# Altium PCB PCB2.PcbDoc
Units mil, origin at the board's own origin, x right, y up, seen from the top; angles counter-clockwise.
Board outline 2040 x 2400 mil, 4 copper layers (Top Layer, GND, POW, Bottom Layer), stack 23.756 mil thick; 58 components, 32 nets, 168 pads, 273 vias.
Unrouted connection lines stored in the file: 72.
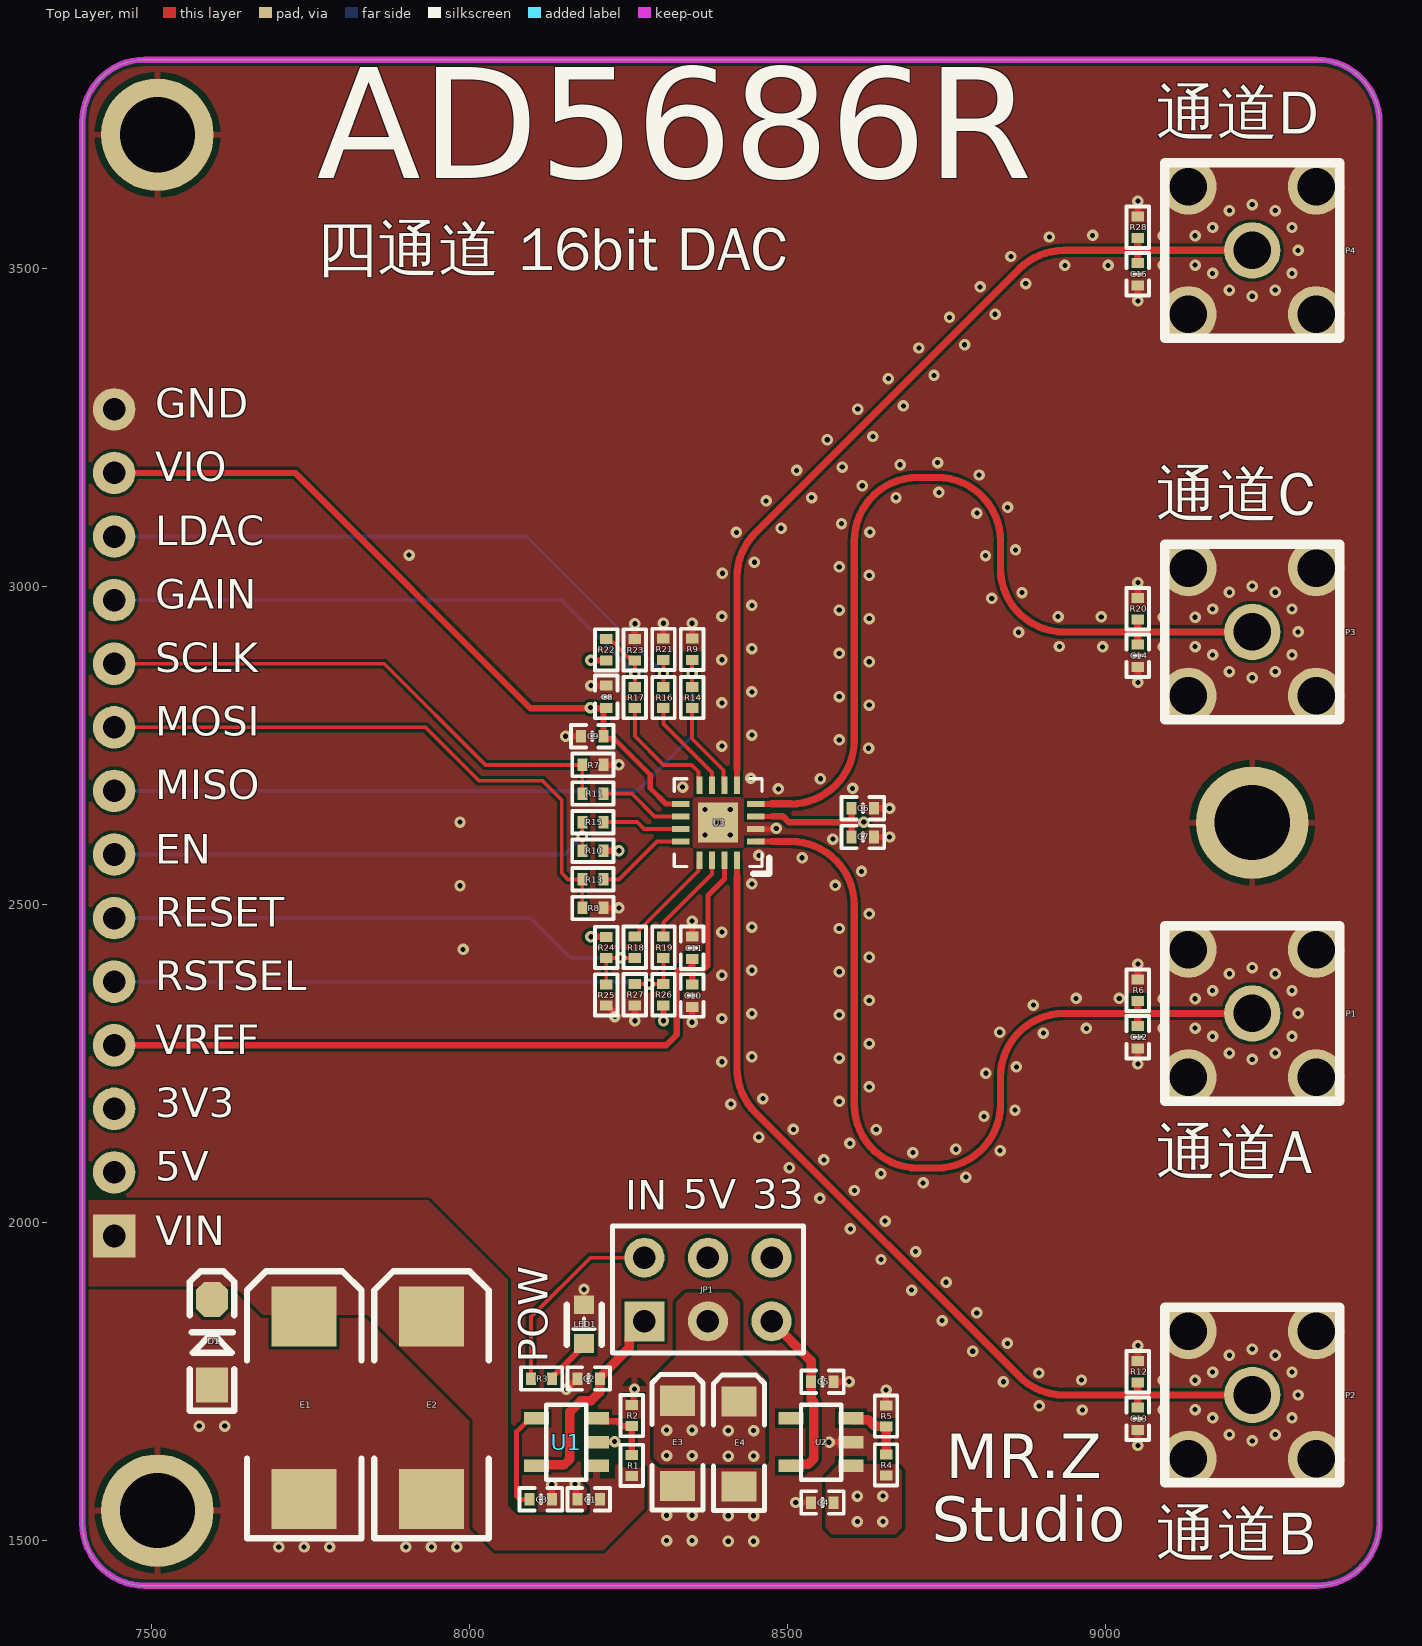
[diagram p0: Top Layer view]
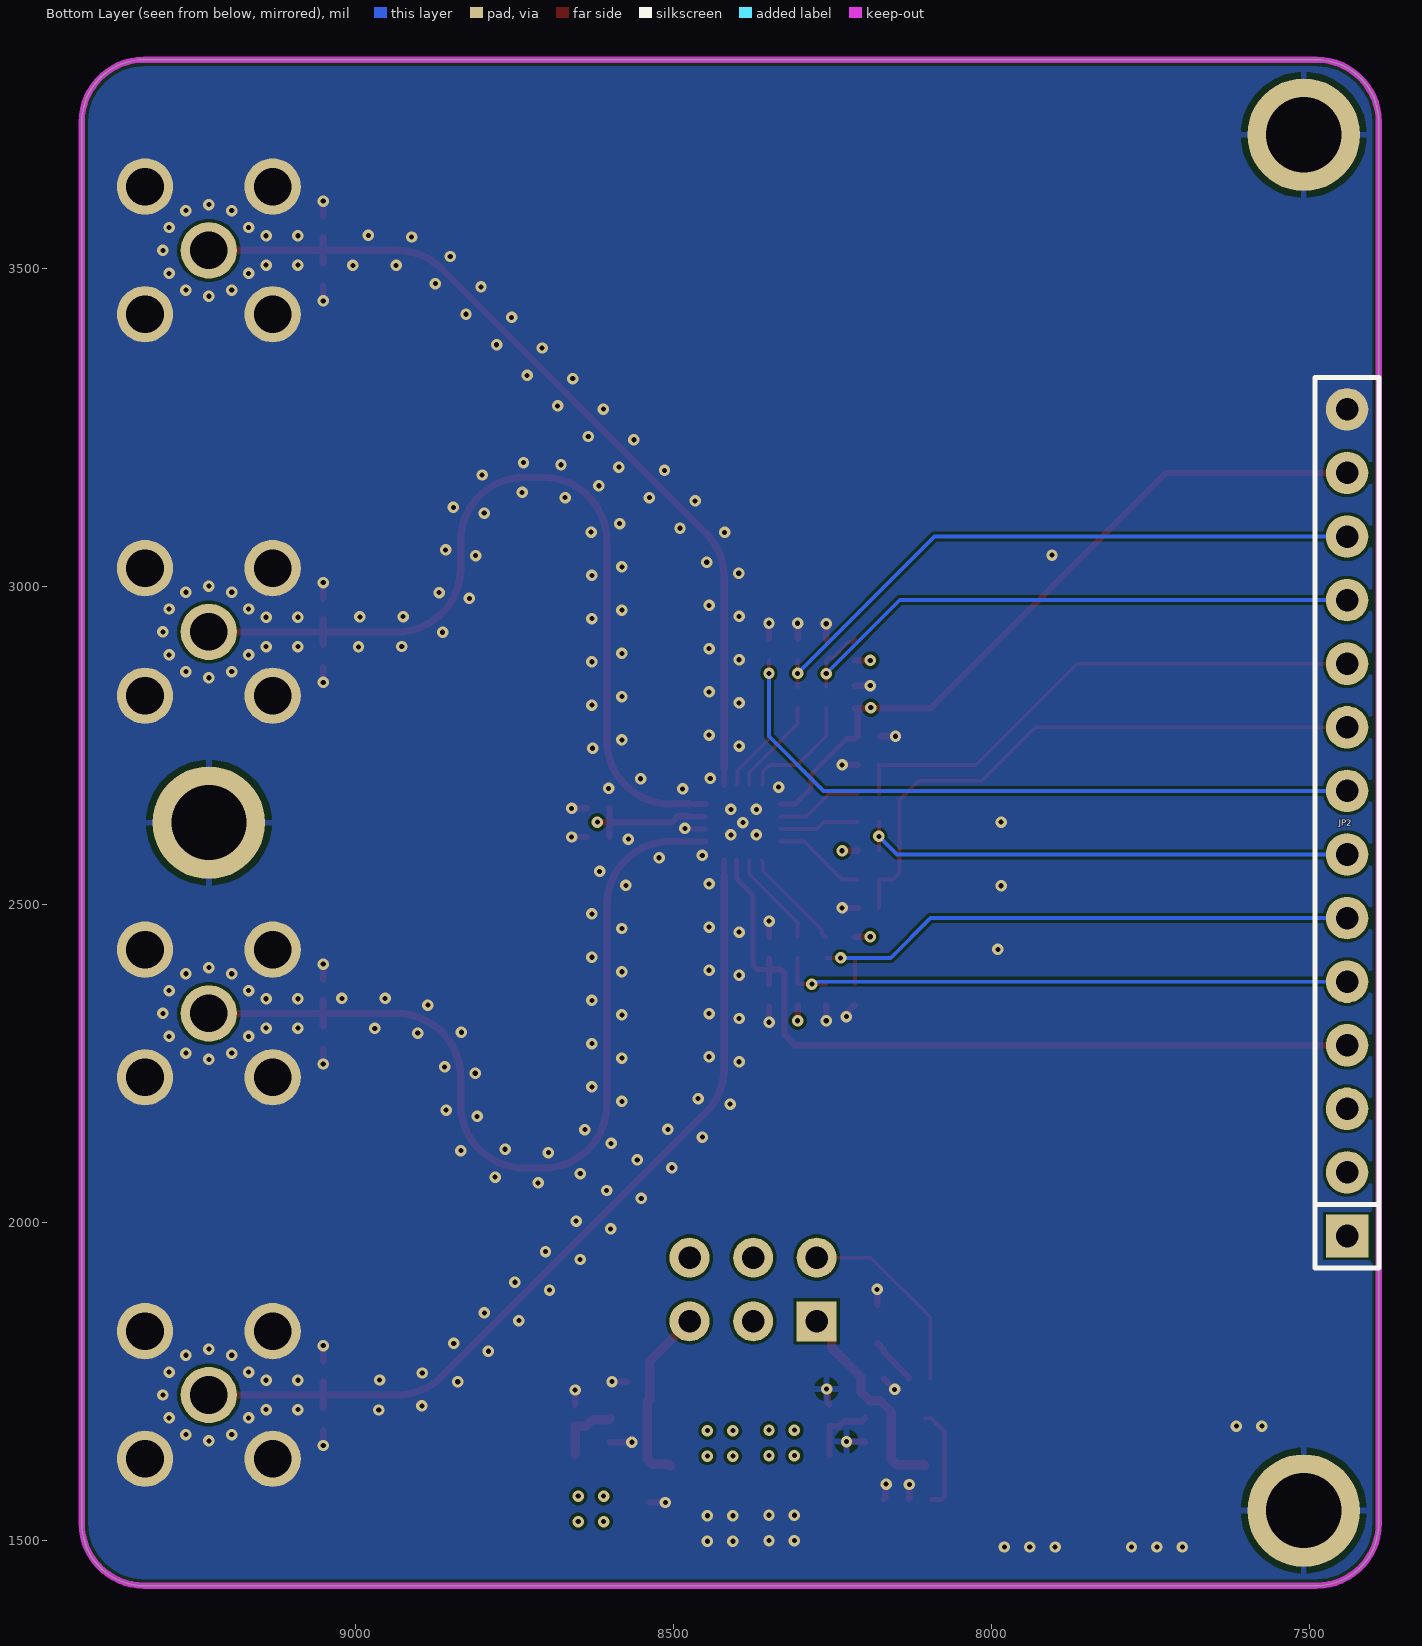
[diagram p1: Bottom Layer view, seen from below]
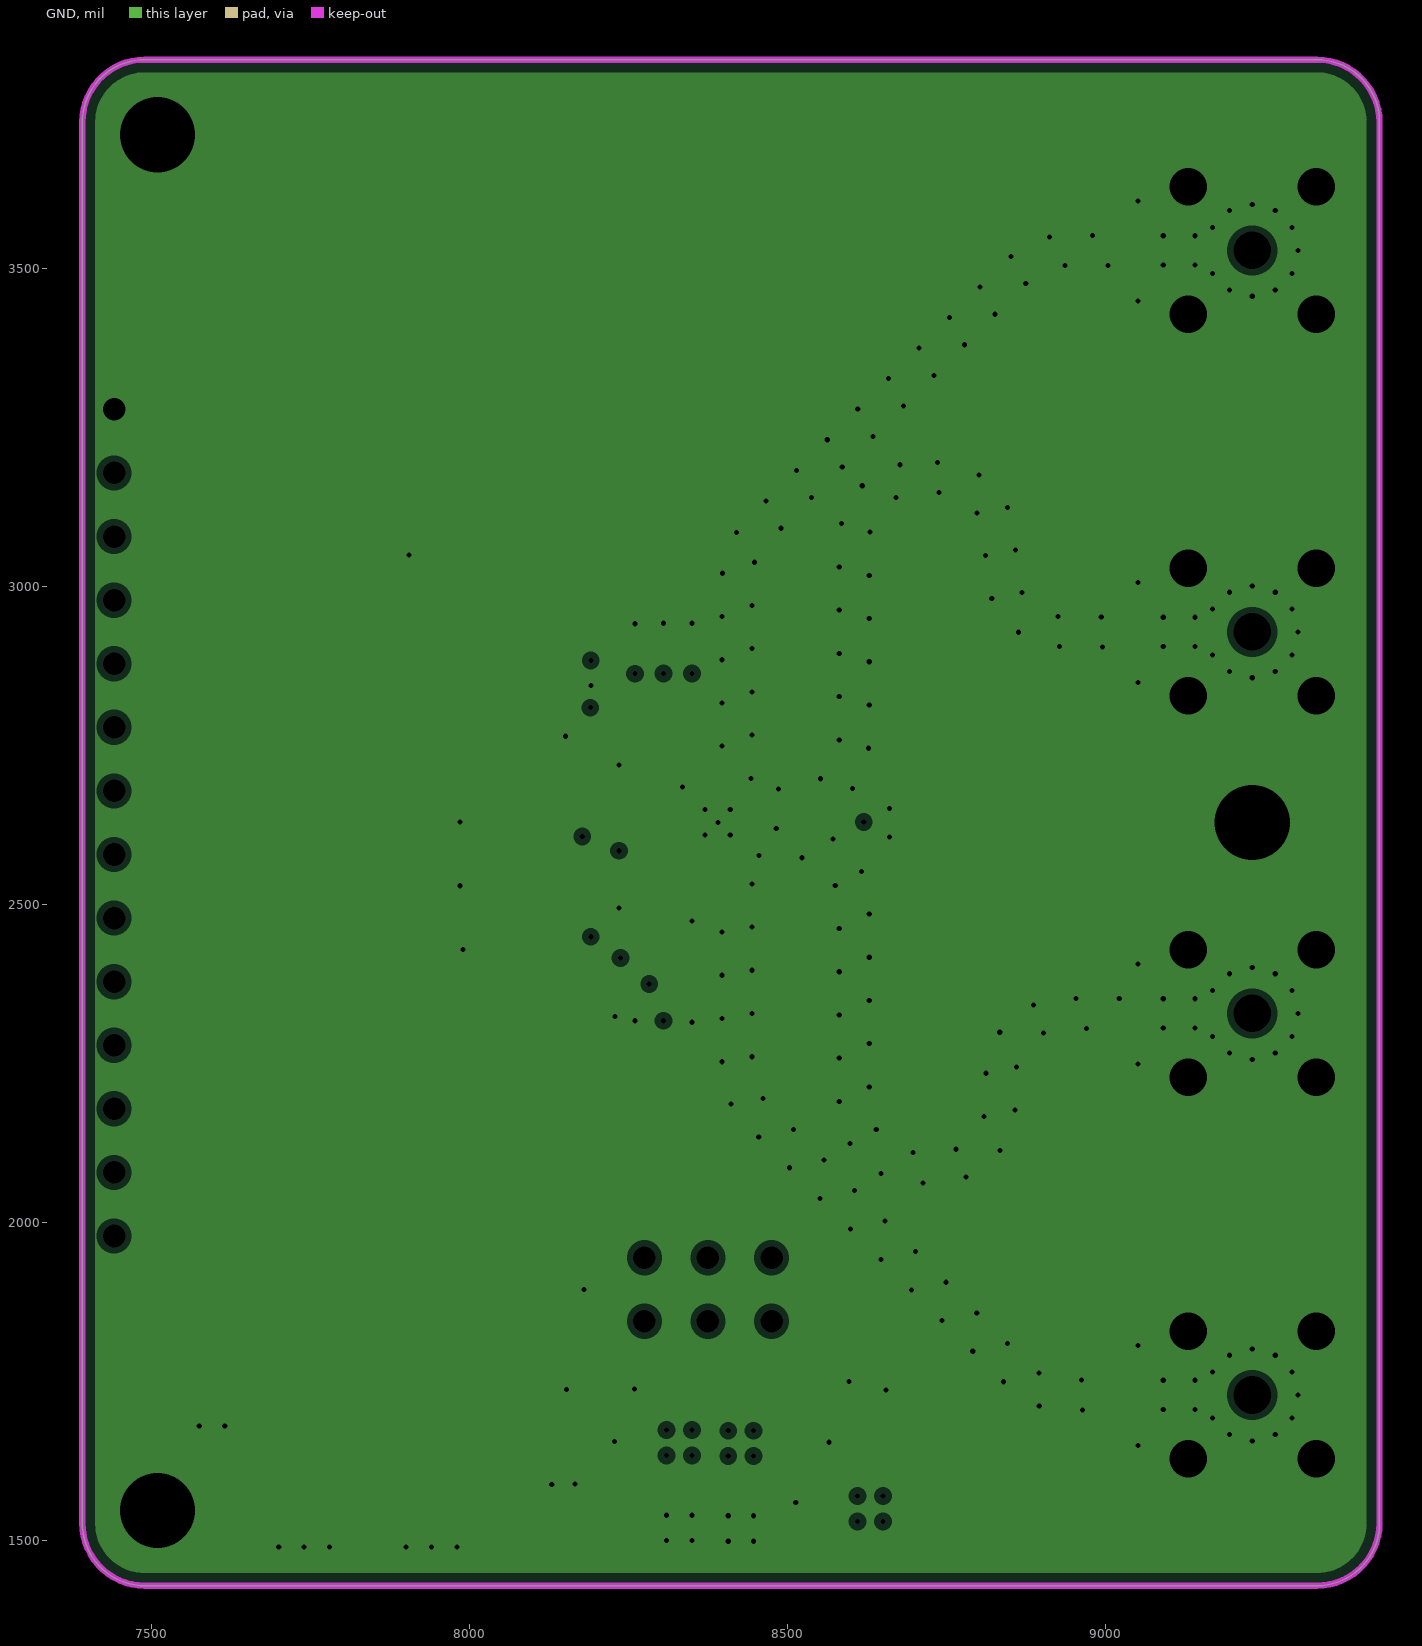
[diagram p2: GND, clearances drawn from the general rule]
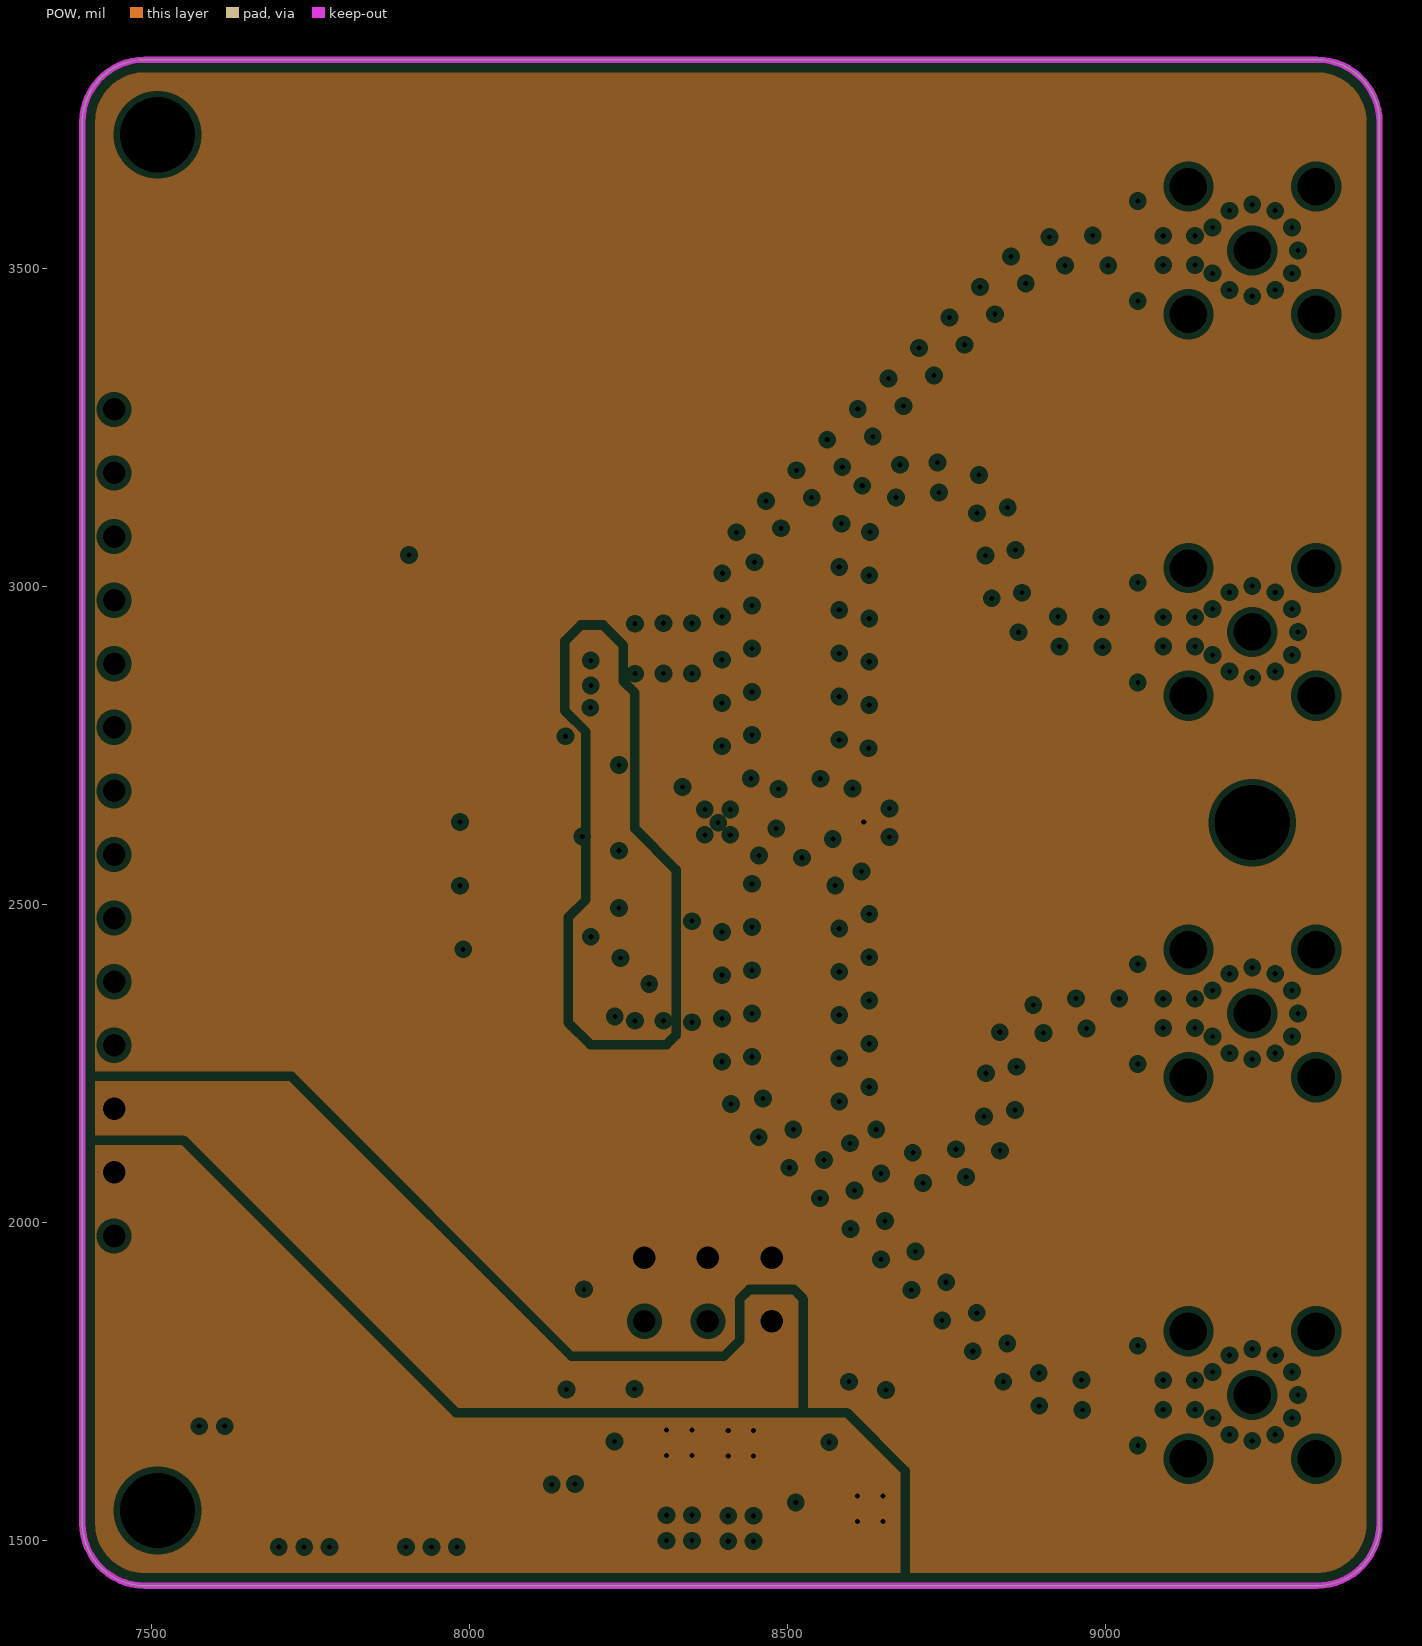
[diagram p3: POW, clearances drawn from the general rule]

## Layer stack, top to bottom
Top Solder: solder mask 0.4, Solder Resist, Dk 3.5
Top Layer: signal copper 1.4
Dielectric 2: prepreg 2.8, PP-006, Dk 4.1
GND: plane copper 1.378, net GND
Dielectric 1: dielectric 12.6, FR-4, Dk 4.8
POW: plane copper 1.378, net VDD
Dielectric 3: prepreg 2.8, PP-006, Dk 4.1
Bottom Layer: signal copper 1.4
Bottom Solder: solder mask 0.4, Solder Resist, Dk 3.5

## Board outline
7391,1527.53 ccw(c7489.43,1527.53) 7489.43,1429.1 9332.57,1429.1 ccw(c9332.57,1527.53) 9431,1527.53 9431,3730.68 ccw(c9332.57,3730.68) 9332.57,3829.1 7489.43,3829.1 ccw(c7489.43,3730.68) 7391,3730.68

## Design rules (kind name [scope] priority, off if disabled: settings)
Clearance [All] p1: gap=5 ignorepadtopadclearanceinfootprint=TRUE
PlaneClearance [All] p1: clearance=10
PlaneConnect [All] p1: planeconnectstyle=Direct reliefexpansion=20 reliefentries=4 reliefconductorwidth=10 reliefairgap=10
PolygonConnect [All] p1: connectstyle=Relief reliefconductorwidth=10 reliefentries=4 polygonreliefangle="90 Angle" airgapwidth=10
RoutingVias [All] p1: holewidth=18 width=18 viastyle="Through Hole" minholewidth=8 minwidth=18 maxholewidth=28 maxwidth=50
SolderMaskExpansion [All] p1: expansion=4 istentingtop=FALSE
Width [All] p1: maxlimit=60 minlimit=5 preferedwidth=8
28 further rules are at their usual default settings.

## Classes and differential pairs
component class POW: C1 C2 C3 C4 C5 D1 E1 E2 E3 E4 JP1 LED1 R1 R2 R3 R4 R5 U2
component class AD5686R: C6 C7 C8 C9 C10 C11 C12 C13 C14 C15 JP2 P1 P2 P3 P4 R6 R7 R8 R9 R10 R11 R12 R13 R14 R15 R16 R17 R18 R19 R20 R21 R22 R23 R24 R25 R26 R27 R28 U3

## Components (designator, comment, footprint, x,y, rotation, side; value= is the part's Value field where it differs from the comment)
C1 "1uF/16V" "C 0402_L" 8187.29,1565 r0 top
C2 "2.2uF/16V" "C 0402_L" 8187.29,1755 r0 top
C3 "10nF/50V" "C 0402_L" 8112.29,1565 r0 top
C4 "1uF/16V" "C 0402_L" 8555,1560 r0 top
C5 "1uF/16V" "C 0402_L" 8555,1750 r180 top
C6 "100nF/16V" "C 0402_L" 8618.61,2651.6 r180 top
C7 "100pF/16V" "C 0402_L" 8618.61,2606.6 r180 top
C8 "100nF/16V" "C 0402_L" 8215,2826.96 r270 top
C9 "100pF/16V" "C 0402_L" 8193.04,2765 r0 top
C10 "100nF/16V" "C 0402_L" 8350,2357.29 r90 top
C11 "100pF/16V" "C 0402_L" 8350,2432.29 r270 top
C12 "200pF/50V" "C 0402_L" 9051,2291.61 r90 top
C13 "200pF/50V" "C 0402_L" 9051,1691.61 r90 top
C14 "200pF/50V" "C 0402_L" 9051,2891.61 r90 top
C15 "200pF/50V" "C 0402_L" 9051,3491.61 r90 top
D1 "BZT52C15" SOD-123 7595,1811.94 r90 top
E1 "4.7uF/35V" "CD E(7343H)" 7740,1708.94 r270 top
E2 "4.7uF/35V" "CD E(7343H)" 7940,1708.94 r270 top
E3 "4.7uF/16V" "CD A(3216)" 8327.03,1653.07 r270 top
E4 "4.7uF/16V" "CD A(3216)" 8423.84,1652.2 r270 top
JP1 "Header3X2" HDR2.54-LI-2x3P 8375,1895 r0 top
JP2 "HDR-1X14" HDR2.54-LI-14P 7441,2629.1 r90 bottom locked
LED1 "红色" LED 8180,1871.02 r270 top
P1 "SMB" SMA 9231,2329.1 r270 top locked
P2 "SMB" SMA 9231,1729.1 r270 top locked
P3 "SMB" SMA 9231,2929.1 r270 top locked
P4 "SMB" SMA 9231,3529.1 r270 top locked
R1 "0" "R 0402_L" 8255,1619.25 r270 top
R2 "10k" "R 0402_L" 8255,1695.75 r90 top
R3 "15K" "R 0402_L" 8112.29,1755 r0 top
R4 "0" "R 0402_L" 8655,1620 r270 top
R5 "10k" "R 0402_L" 8655,1695 r90 top
R6 "2K" "R 0402_L" 9051,2364.64 r90 top
R7 "10k" "R 0402_L" 8195,2720 r180 top
R8 "10k" "R 0402_L" 8195,2495 r180 top
R9 "10k" "R 0402_L" 8350,2902.71 r270 top
R10 "10k" "R 0402_L" 8195,2585 r180 top
R11 "0" "R 0402_L" 8195,2675 r180 top
R12 "2K" "R 0402_L" 9051,1764.64 r90 top
R13 "0" "R 0402_L" 8195,2540 r180 top
R14 "0" "R 0402_L" 8350,2825 r90 top
R15 "0" "R 0402_L" 8195,2630 r180 top
R16 "0" "R 0402_L" 8305,2825 r90 top
R17 "0" "R 0402_L" 8260,2825 r90 top
R18 "0" "R 0402_L" 8260,2434.25 r270 top
R19 "0" "R 0402_L" 8305,2434.25 r270 top
R20 "2K" "R 0402_L" 9051,2964.64 r90 top
R21 "NOT" "R 0402_L" 8305,2902.71 r270 top
R22 "NOT" "R 0402_L" 8215,2900 r90 top
R23 "NOT" "R 0402_L" 8260,2901.96 r270 top
R24 "NOT" "R 0402_L" 8215,2433.96 r270 top
R25 "10k" "R 0402_L" 8215,2359.25 r270 top
R26 "10k" "R 0402_L" 8305.01,2359.54 r270 top
R27 "NOT" "R 0402_L" 8260.01,2357.57 r90 top
R28 "2K" "R 0402_L" 9051,3564.64 r90 top
U1 "LP2985A" SOT23-5 8199.49,1617.6 r90 top locked
U2 "ADP150" SOT23-5 8600,1617.6 r90 top
U3 "AD5686R" AD5686R 8470.06,2680.05 r180 top locked

## Footprints (in the part's own frame and the unit in brackets; to place one, negate y for a bottom-side part, rotate by r counter-clockwise, add the part's x,y. Pads: shape width x height; smd on the part's side, far side on the other; paste and mask are expansions set on the pad)
AD5686R [mm]
  rect 0.7x0.23 smd: 1(0.508,2.044) 2(0.508,1.544) 3(0.508,1.044) 4(0.508,0.544) 9(3.508,0.544) 10(3.508,1.044) 11(3.508,1.544) 12(3.508,2.044)
  rect 0.23x0.7 smd: 5(1.258,-0.206) 6(1.758,-0.206) 7(2.258,-0.206) 8(2.758,-0.206) 13(2.758,2.794) 14(2.258,2.794) 15(1.758,2.794) 16(1.258,2.794)
  rect 1.6x1.6 smd: 17(2.008,1.294)
  silkscreen extent 0.25,-0.46 3.76,3.05
"C 0402_L" [mm] "无极性贴片电容"
  rect 0.4x0.5 smd: 1(-0.45,0) 2(0.45,0)
  silkscreen extent -0.85,-0.45 0.85,0.45, body extent -0.5,-0.26 0.5,0.26, height 0.53
"CD A(3216)" [mm] "长3.2mm，宽1.6mm，厚1.6mm"
  rect 1.2x1.4 smd: 1(-1.7,0) 2(1.7,0)
  silkscreen extent -2.74,-1.02 2.67,1.02, body extent -1.6,-0.8 1.6,0.8, height 1.6
"CD E(7343H)" [mm] "长7.3mm，宽4.3mm，厚4.0mm"
  rect 2.4x2.6 smd: 1(-3.65,0) 2(3.65,0)
  silkscreen extent -5.46,-2.29 5.21,2.29, body extent -3.65,-2.15 3.65,2.15, height 4
HDR2.54-LI-2x3P [mm] "双排排针，3x2脚"
  rect 1.6x1.6 hole 0.9: 1(-2.54,-1.27)
  round 1.6 hole 0.9: 2(-2.54,1.27) 3(0,-1.27) 4(0,1.27) 5(2.54,-1.27) 6(2.54,1.27)
  silkscreen extent -3.81,-2.54 3.81,2.54, body extent -3.81,-2.54 3.81,2.54, height 8.5
HDR2.54-LI-14P [mm] "排针，14脚"
  rect 1.7x1.7 hole 0.9: 1(-16.51,0)
  round 1.7 hole 0.9: 2(-13.97,0) 3(-11.43,0) 4(-8.89,0) 5(-6.35,0) 6(-3.81,0) 7(-1.27,0) 8(1.27,0) 9(3.81,0) 10(6.35,0) 11(8.89,0) 12(11.43,0) 13(13.97,0) 14(16.51,0)
  silkscreen extent -17.78,-1.27 17.78,1.27, body extent -17.78,-1.27 17.78,1.27, height 8.5
LED [mm]
  rect 0.75x0.8 smd: 1(1.55,0) 2(0,0)
  silkscreen extent 0,-0.69 1.6,0.71
"R 0402_L" [mm] "1/16W贴片电阻"
  rect 0.4x0.5 smd: 1(-0.4,0) 2(0.45,0)
  silkscreen extent -0.8,-0.45 0.85,0.45, body extent -0.5,-0.25 0.5,0.25, height 0.3
SMA [mm]
  round 2.25 hole 1.5: 1(0,0) 2(-2.55,2.55) 2(-2.55,-2.55) 2(2.55,2.55) 2(2.55,-2.55)
  silkscreen extent -3.5,-3.5 3.5,3.5, body extent -3.5,-3.5 3.5,11.6, height 10
SOD-123 [mil] "2.7x1.6X1.1mm（长宽高，不包括引脚）"
  rect 55x50 smd: 1(-67.5,0)
  oct 55x50 smd: 2(67.5,0)
  silkscreen extent -108,-35 112,35, body extent -73,-31 73,31, height 48
SOT23-5 [mm]
  rect 0.5x1 smd: 1(0,0) 2(0.95,0) 3(1.9,0) 4(1.9,2.4) 5(0,2.4)
  silkscreen extent -0.55,0.4 2.45,2, body extent -0.5,-0.2 2.4,2.6, height 1.09

## Part data
C1 C2 C4 C5 C6 C7 C8 C9 C10 C11 C12 C13 C14 C15: library part C, "贴片电容", 主类型=电容, 元件封装=0402, 具体类型=陶瓷电容, 封装类型=贴片
  C1 C4 C5: 值/型号=1uF/16V, 值精度=±10%, 温度漂移=X5R, 生产商=SAMSUNG(三星), 生产商零件编码=CL05A105KO5NNNC, 立创编号=C29266
  C2: 值/型号=2.2uF/16V, 值精度=±10%, 温度漂移=X5R, 生产商=SAMSUNG(三星), 生产商零件编码=CL05A225KO5NQNC, 立创编号=C170151
  C6 C8 C10: 值/型号=100nF/16V, 值精度=±10%, 温度漂移=X7R（15%）, 温度范围="-55°C ~ 125°C", 生产商=YAGEO(国巨), 生产商零件编码=CC0402KRX7R7BB104, 立创编号=C60474
  C7 C9 C11: 值/型号=100pF/16V, 值精度=±10%, 温度漂移=X7R（15%）, 温度范围="-55°C ~ 125°C", 生产商=YAGEO(国巨), 生产商零件编码=CC0402JRNPO9BN101, 立创编号=C106200
  C12 C13 C14 C15: 值/型号=200pF/50V, 值精度=±5%, 温度漂移=X7R（15%）, 温度范围="-55°C ~ 125°C", 生产商=YAGEO(国巨), 生产商零件编码=CC0402JRNPO9BN201, 立创编号=C325462
C3: library part C, "贴片电容 10nF/50V", 主类型=电容, 值/型号=10nF/50V, 值精度=±5%, 元件封装=0402, 具体类型=陶瓷电容, 封装类型=贴片, 温度漂移=C0G, 温度范围="-55°C ~ 125°C", 生产商=YAGEO(国巨), 生产商零件编码=CC0402JRX7R9BB103, 立创编号=C272878
D1: library part IN4735A, 主类型=二极管, 值/型号=BZT52C15, 元件封装=SOD-123, 具体类型=稳压二极管, 封装类型=贴片, 生产商=MDD, 生产商零件编码=BZT52C15, 立创编号=C173427
E1 E2: library part C-CD, "聚合物电容 4.7uF/35V", 主类型=电容, 值/型号=4.7uF/35V, 值精度=±20%, 元件封装=CASE-D_7343, 具体类型=聚合物电容, 封装类型=贴片, 温度范围="-55℃ ~ +105℃", 生产商=VISHAY(威世), 生产商零件编码=293D475X0035D2TE3, 立创编号=C215880
E3 E4: library part C-CD, "聚合物电容 4.7uF/16V", 主类型=电容, 值/型号=4.7uF/16V, 值精度=±20%, 元件封装=CASE-A_3216, 具体类型=聚合物电容, 封装类型=贴片, 温度范围="-55℃ ~ +105℃", 生产商=Sunlord(顺络), 生产商零件编码=TC211A475M016A, 立创编号=C136628
JP1: library part "Header 3X2", "3*2P接插件", BOM名称=3*2P接插件, 学习资源=www.ooocke.com, 版权归属=源创客
JP2: library part "Header 14", "14P接插件", BOM名称=14P接插件, 学习资源=www.ooocke.com, 版权归属=源创客
LED1: library part LED-SMD, "C84267"
P1 P2 P3 P4: "SMB Straight Connector"
R1 R4 R6 R11 R12 R13 R14 R15 R16 R17 R18 R19 R20 R28: library part R, "贴片电阻 0402 1%", 主类型=电阻, 元件封装=0402, 具体类型=贴片电阻, 封装类型=贴片, 温度漂移=±100ppm/℃
  R1 R4 R11 R13 R14 R15 R16 R17 R18 R19: 值/型号=0, 值精度=±1%, 生产商=国巨, 生产商零件编码=RC0402FR-070RL, 立创编号=C106231
  R6 R12 R20 R28: 值/型号=2K, 值精度=±0.1%, 生产商=光颉(Viking), 生产商零件编码=AR02BTC2001, 立创编号=C317918
R2 R5 R7 R8 R9 R10 R21 R22 R23 R24 R25 R26 R27: library part R, "贴片电阻", 主类型=电阻, 值精度=±1%, 元件封装=0402, 具体类型=贴片电阻, 封装类型=贴片, 温度漂移=±100ppm/℃, 生产商=YAGEO（国巨）, 生产商零件编码=RC0402FR-0710KL, 立创编号=C60490
  R2 R5 R7 R8 R9 R10 R25 R26: 值/型号=10K
  R21 R22 R23 R24 R27: 值/型号=0
R3: library part R, "贴片电阻 0402 5%", 主类型=电阻, 值/型号=15K, 值精度=±1%, 元件封装=0402, 具体类型=贴片电阻, 封装类型=贴片, 温度漂移=50ppm, 生产商=国巨, 生产商零件编码=RT0402FRE0715KL, 立创编号=C136975
U2: "ADP150AUJZ-3.3-R7", 主类型=电源芯片, 值/型号=ADP150AUJZ-3.3-R7, 元件封装=SOT-23-5, 具体类型=线性稳压芯片, 封装类型=贴片, 生产商=ADI(亚德诺)/LINEAR, 生产商零件编码=ADP150AUJZ-3.3-R7, 立创编号=C29149

## Free pads (board coordinates)
  round 177.17 hole 118.11: 2(7509.11,1547.21) 2(7509.11,3710.99) 2(9231,2629.1)

## Via types
v1: diameter 18, hole 8, Top Layer to Bottom Layer, tented both sides, 273 vias

## Nets (pads, with @x,y where several pads share a name; then routed paths per layer and width w, separated by ;. In a path a pad name is that pad's centre, name@x,y a point inside that pad or via, vN(x,y) a via of type N, cw(c..) or ccw(c..) an arc to the next point about the centre after c; other vN are vias at no path point)
3V3: C5.2 JP1.5 JP2.3 U2.5 | length 284.1
  Top Layer w15: JP1.5 8537.29,1782.71 C5.2 8537.66,1749.63 8537.66,1721.69 8541.25,1718.11 8541.25,1628.73 8532.46,1619.94 8507.85,1619.94 U2.5
5V: C4.2 E3.1 E4.1 JP1.3 JP2.2 R4.2 U2.1
  other v1: 8610,1530 8650,1530 8610,1570 8650,1570 8406.81,1632.99 8446.81,1632.99 8310,1633.86 8350,1633.86 8406.81,1672.99 8446.81,1672.99 8310,1673.86 8350,1673.86
EN: JP2.7 R10.2 R15.2 | length 793
  Top Layer w6: R10.2 v1(8177.29,2607.5) R15.2
  Bottom Layer w6: JP2.7 8148.89,2579.1 v1(8177.29,2607.5)
GAIN: JP2.11 R17.2 R22.2 R23.2 | length 967.3
  Top Layer w6: R22.2 8219.88,2912.84 8225.8,2912.84 8249.51,2889.12 8255.12,2889.12 R23.2 v1(8260,2863.48) R17.2
  Bottom Layer w6: JP2.11 8144.38,2979.1 v1(8260,2863.48)
GND: C1.1 C2.1 C3.2 C4.1 C5.1 C6.1 C7.1 C8.1 C9.1 C10.1 C11.1 C12.1 C13.1 C14.1 C15.1 D1.1 E1.2 E2.2 E3.2 E4.2 JP2.14 LED1.2 P1.2 P2.2 P3.2 P4.2 pad.2 R2.2 R5.2 R6.2 R7.1 R8.1 R9.1 R12.2 R20.2 R21.1 R23.1 R25.2 R27.1 R28.2 U1.2 U2.2 U3.2 U3.17 | length 803.7
  Top Layer w8: U3.2 8481.54,2619.26 v1(8482.42,2620.14)
  Top Layer w10: v1@8128.63,1589.04 v1(8129.31,1588.35) 8129.31,1565.68 C3.2 ; v1(8151.07,2765) C9.1 ; v1(8152.42,1737.86) C2.1 ; v1(8165.88,1589) 8167.41,1587.47 8167.41,1567.16 C1.1 ; LED1.2 v1(8180,1895.27) ; v1(8190.75,2844.68) C8.1 ; U1.2 8199.87,1655.38 8227.81,1655.38 v1(8228.2,1655.76) ; R8.1 v1(8235,2495) ; R7.1 v1(8235,2720) ; R25.2 8216.97,2341.54 8226.92,2331.58 8226.92,2325.67 v1(8228.45,2324.14) ; R2.2 8255.05,1713.46 8257.93,1716.34 8257.93,1736.95 v1(8259.46,1738.48) ; v1(8260.01,2317.57) R27.1 ; R23.1 v1(8260,2941.96) ; R21.1 v1(8305,2942.71) ; v1(8350,2315.32) C10.1 ; C11.1 v1(8350,2474.25) ; R9.1 v1(8350,2942.71) ; v1(8513.03,1560) C4.1 ; v1(8565.59,1654.7) 8565.74,1654.85 8599.85,1654.85 U2.2 ; C5.1 v1(8596.97,1750) ; C7.1 v1(8660.58,2606.6) ; C6.1 v1(8660.58,2651.6) ; R5.2 v1(8655,1736.96) ; v1(9051,1649.64) C13.1 ; R12.2 v1(9051,1806.6) ; v1(9051,2249.64) C12.1 ; R6.2 v1(9051,2406.6) ; v1(9051,2849.64) C14.1 ; R20.2 v1(9051,3006.6) ; v1(9051,3449.64) C15.1 ; R28.2 v1(9051,3606.6)
  other v1: 7700,1490 7740,1490 7780,1490 7900,1490 7940,1490 7980,1490 8406.81,1499.13 8446.81,1499.13 8310,1500 8350,1500 8406.81,1539.13 8446.81,1539.13 8310,1540 8350,1540 9231,1656.99 9194.94,1666.65 9267.06,1666.65 7575,1680 7615,1680 9168.55,1693.05 9293.45,1693.05 8963.7,1705.52 9091,1706 9141,1706 8896.02,1712.09 9303.11,1729.1 8839.47,1749.86 9091,1752.2 9141,1752.2 8962.42,1752.69 8895.32,1763.69 9168.55,1765.16 9293.45,1765.16 9194.94,1791.55 9267.06,1791.55 8791.39,1797.94 9231,1801.21 8845.77,1810.27 8743.3,1846.03 8797.69,1858.35 8695.22,1894.11 8749.6,1906.43 8647.14,1942.19 8701.52,1954.52 8599.05,1990.28 8653.44,2002.6 8550.97,2038.36 8605.35,2050.68 8713.27,2062.53 8780.64,2071.77 8646.91,2077.37 8502.89,2086.44 8557.27,2098.76 8697.13,2110.14 8834.48,2113.32 8764.92,2115.49 8598.22,2124.84 8454.8,2134.53 8639.64,2146.45 8509.19,2146.85 8809.09,2167.19 8857.79,2177.2 8411.11,2186.63 8581.47,2190.74 8461.39,2195.22 8628.64,2213.56 8811.99,2235.13 8860.04,2245.16 8396.94,2253.14 9231,2256.99 8581.47,2258.74 8444.11,2260.99 9194.94,2266.65 9267.06,2266.65 8628.64,2281.56 9168.55,2293.05 9293.45,2293.05 8902.44,2298.32 8833.78,2299.54 8970.06,2305.52 9091,2306 9141,2306 8396.94,2321.14 8581.47,2326.74 8444.11,2328.99 9303.11,2329.1 8886.64,2342.32 8628.64,2349.56 9091,2352.2 9141,2352.2 8953.84,2352.69 9021.84,2352.69 9168.55,2365.16 9293.45,2365.16 8396.94,2389.14 9194.94,2391.55 9267.06,2391.55 8581.47,2394.74 8444.11,2396.99 9231,2401.21 8628.64,2417.56 7990,2430 8396.94,2457.14 8581.47,2462.74 8444.11,2464.99 8628.64,2485.56 7985,2530 8575.17,2530.45 8444.11,2532.99 8616.41,2552.45 8522.93,2573.98 8455.03,2577.71 8571.32,2603.35 8370,2610 8410,2610 8391,2629.1 7985,2630 8370,2650 8410,2650 8485.79,2682.21 8602.36,2683 8335,2685 8551.88,2698.23 8442.39,2698.84 8627.56,2746.15 8396.94,2749.43 8581.47,2759.46 8444.11,2766.82 8628.64,2814.15 8396.94,2817.43 8581.47,2827.46 8444.11,2834.82 9231,2856.99 9194.94,2866.65 9267.06,2866.65 8628.64,2882.15 8396.94,2885.43 9168.55,2893.05 9293.45,2893.05 8581.47,2895.46 8444.11,2902.82 8927.64,2906.19 8995.63,2905.52 9091,2906 9141,2906 8863.44,2928.62 9303.11,2929.1 8628.64,2950.15 9091,2952.2 9141,2952.2 8396.94,2953.43 8925.51,2953.28 8993.51,2952.69 8581.47,2963.46 9168.55,2965.16 9293.45,2965.16 8444.11,2970.82 8821.27,2981.97 8868.83,2990.85 9194.94,2991.55 9267.06,2991.55 9231,3001.21 8628.64,3018.15 8397.57,3021.42 8581.47,3031.46 8448,3038.71 8811.42,3049.25 7905,3050 8858.58,3058.07 8419.71,3085.72 8629.68,3086.14 8490.01,3092.18 8585,3099.37 8797.88,3115.89 8846.35,3124.96 8466.34,3135.21 8538.09,3140.26 8670.72,3140.35 8738.23,3148.53 8617.66,3159.01 8801.26,3175.86 8514.42,3183.3 8586.18,3188.35 8677.13,3191.99 8736.14,3195.44 8562.5,3231.38 8634.26,3236.43 8610.59,3279.46 8682.34,3284.51 8658.67,3327.55 8730.43,3332.6 8706.75,3375.63 8778.51,3380.68 8754.84,3423.71 8826.59,3428.76 9231,3456.99 9194.94,3466.65 9267.06,3466.65 8802.92,3471.8 8874.68,3476.85 9168.55,3493.05 9293.45,3493.05 8936.34,3505.52 9004.34,3505.52 9091,3506 9141,3506 8851.34,3519.54 9303.11,3529.1 8912.04,3550.2 9091,3552.2 9141,3552.2 8979.99,3552.69 9168.55,3565.16 9293.45,3565.16 9194.94,3591.55 9267.06,3591.55 9231,3601.21
LDAC: JP2.12 R16.2 R21.2 | length 995.4
  Top Layer w6: R16.2 v1(8305,2863.86) R21.2
  Bottom Layer w6: JP2.12 8089.76,3079.1 v1(8305,2863.86)
MISO: JP2.8 R9.2 R14.2 | length 1085.7
  Top Layer w6: R14.2 v1(8350,2863.86) R9.2
  Bottom Layer w6: JP2.8 8264.1,2679.1 8350,2765 v1(8350,2863.86)
MOSI: JP2.9 R8.2 R13.2 | length 947.7
  Top Layer w6: JP2.9 7930.9,2779.1 8015,2695 8115,2695 8145,2665 8145,2550 8155,2540 R13.2 R8.2
NetC2_2: C2.2 JP1.1 U1.5 | length 332
  Top Layer w15: U1.5 8106.87,1619.47 8148.94,1619.47 8157.73,1628.25 8157.73,1702.73 8175,1720 8191.21,1720 8204.63,1733.41 8204.63,1754.63 C2.2 8205,1756.97 8251,1802.97 8251,1821 JP1.1
NetC3_1: C3.1 U1.4 | length 163.7
  Top Layer w6: U1.4@8088.31,1685.56 8095.16,1692.4 U1.4
  Top Layer w8: U1.4@8088.31,1685.56 8074.1,1671.35 8074.1,1569.69 8078.79,1565 C3.1
NetLED1_1: LED1.1 R3.2 | length 76.3
  Top Layer w10: R3.2 8130,1756.97 8169.25,1796.22 8169.25,1800.24 8179.02,1810 LED1.1
NetR1_1: R1.1 R2.1 U1.3 | length 105.6
  Top Layer w10: U1.3 8204.33,1687.56 8232.44,1687.56 8240,1680 R2.1 R1.1
NetR4_1: R4.1 R5.1 U2.3 | length 104
  Top Layer w15: U2.3 8602.34,1690.06 8627.35,1690.06 8637.79,1679.62 8654.63,1679.62 R5.1 R4.1
NetR11_1: R11.1 U3.10 | length 136.1
  Top Layer w6: R11.1 8255,2675 8291.05,2638.95 U3.10
NetR13_1: R13.1 U3.12 | length 145.9
  Top Layer w6: R13.1 8235.01,2540 8294.59,2599.58 U3.12
NetR14_1: R14.1 U3.6 | length 142.1
  Top Layer w6: R14.1 8350,2761 8399.42,2711.58 8399.42,2689.58 U3.6
NetR15_1: R15.1 U3.11 | length 125.6
  Top Layer w6: R15.1 8263.79,2630 8274.53,2619.26 U3.11
NetR16_1: R16.1 U3.7 | length 152.6
  Top Layer w6: R16.1 8305,2784.24 8381.16,2708.08 U3.7
NetR17_1: R17.1 U3.8 | length 189
  Top Layer w6: R17.1 8260,2765 8305,2720 8349.1,2720 8359.94,2709.15 8359.94,2689.69 U3.8
NetR18_1: R18.1 U3.13 | length 163.2
  Top Layer w6: R18.1 8261.97,2450 8266.84,2454.87 8266.84,2460.48 8359.94,2553.58 8359.94,2568.52 U3.13
NetR19_1: R19.1 U3.14 | length 151.6
  Top Layer w6: R19.1 8305,2472.42 8381.16,2548.57 U3.14
RESET: JP2.6 R18.2 R24.2 R25.1 | length 908.8
  Top Layer w6: R25.1 R24.2 8215.14,2416.39 v1(8237.5,2416.39) 8259.86,2416.39 R18.2
  Bottom Layer w6: JP2.6 8095.9,2479.1 8158.61,2416.39 v1(8237.5,2416.39)
RSTSEL: JP2.5 R19.2 R26.1 R27.2 | length 929.3
  Top Layer w6: R27.2 v1(8282.51,2375.29) R26.1 R19.2
  Bottom Layer w6: JP2.5 8275.44,2379.1 8279.26,2375.29 v1(8282.51,2375.29)
SCLK: JP2.10 R7.2 R11.2 | length 847.2
  Top Layer w6: JP2.10 7865.9,2879.1 8025,2720 R7.2 R11.2
VDD: C6.2 C7.2 JP1.2 JP1.4 JP1.6 R3.1 U3.3 | length 532.5
  Top Layer w6: R3.1 8096.54,1851.54 8190,1945 JP1.2
  Top Layer w8: U3.3 8450.11,2639 8477.1,2639
  Top Layer w10: 8477.1,2639 8477.24,2639.14 8493.07,2639.14 8502.22,2630 8600.9,2630 ; C7.2 8600.9,2630 ; C6.2 8600.9,2630 ; v1(8620,2630) 8600.9,2630
VIN: C1.2 D1.2 E1.1 E2.1 JP2.1 R1.2 U1.1
VIO: C8.2 C9.2 JP2.13 R10.1 R22.1 R24.1 R26.2 U3.9 | length 1248.7
  Top Layer w8: C9.2 8211.69,2764.06 8214.57,2761.18 8227.71,2761.18 8284.23,2704.65 8284.23,2683.44 8309.04,2658.63 U3.9
  Top Layer w10: JP2.13 7725.9,3179.1 8095.75,2809.25 C8.2 8213.63,2809.25 8210.75,2806.37 C9.2 ; v1(8190.75,2449.71) R24.1 ; v1(8190.75,2884.25) R22.1 ; R10.1 v1(8235,2585) ; v1(8305,2317.57) R26.2
  other v1: 8190,2810
VOUTA: C12.2 P1.1 R6.1 U3.1 | length 1405.3
  Top Layer w9: U3.1 8475.06,2599.58
  Top Layer w11.55: 8475.06,2599.58 8505.06,2599.58 cw(c8505.06,2499.58) 8575.77,2570.29 cw(c8505.06,2499.58) 8605.06,2499.58 8605.06,2186.12 ccw(c8705.06,2186.12) 8705.06,2086.12 8735,2086.12 ccw(c8735,2186.12) 8835,2186.12 8835,2229.1 cw(c8935,2229.1) 8935,2329.1 9051,2329.1 ; C12.2 9051,2329.1 ; R6.1 9051,2329.1 ; P1.1 9051,2329.1
VOUTB: C13.2 P2.1 R12.1 U3.16 | length 1405.3
  Top Layer w9: 8420.53,2545.05 U3.16
  Top Layer w11.55: 8420.53,2545.05 8420.53,2243.58 ccw(c8520.53,2243.58) 8449.82,2172.86 8864.29,1758.39 ccw(c8935,1829.1) 8935,1729.1 9051,1729.1 ; C13.2 9051,1729.1 ; R12.1 9051,1729.1 ; P2.1 9051,1729.1
VOUTC: C14.2 P3.1 R20.1 U3.4 | length 1405.3
  Top Layer w9: U3.4 8475.06,2658.63
  Top Layer w11.55: 8475.06,2658.63 8505.06,2658.63 ccw(c8505.06,2758.63) 8575.77,2687.92 ccw(c8505.06,2758.63) 8605.06,2758.63 8605.06,3072.09 cw(c8705.06,3072.09) 8705.06,3172.09 8735,3172.09 cw(c8735,3072.09) 8835,3072.09 8835,3029.1 ccw(c8935,3029.1) 8935,2929.1 9051,2929.1 ; C14.2 9051,2929.1 ; R20.1 9051,2929.1 ; P3.1 9051,2929.1
VOUTD: C15.2 P4.1 R28.1 U3.5 | length 1405.3
  Top Layer w9: U3.5 8420.53,2713.16
  Top Layer w11.55: 8420.53,2713.16 8420.53,3014.63 cw(c8520.53,3014.63) 8449.82,3085.34 8864.29,3499.81 cw(c8935,3429.1) 8935,3529.1 9051,3529.1 ; C15.2 9051,3529.1 ; R28.1 9051,3529.1 ; P4.1 9051,3529.1
VREF: C10.2 C11.2 JP2.4 U3.15 | length 1263.9
  Top Layer w8: 8344.14,2398.27 8369.14,2398.27 8375,2404.12 8375,2514.73 8400.84,2540.57 U3.15
  Top Layer w10: JP2.4 8309.14,2279.1 8325.68,2295.65 8325.68,2392.41 8331.54,2398.27 8344.14,2398.27 ; C10.2 8350,2392.41 8344.14,2398.27 ; C11.2@8350,2414.95 8350,2404.12 8344.14,2398.27
pads on no net: U2.4

## Polygon pours and split planes (outlines as drawn)
VIN on Top Layer "NONET_L-01_P-001" (solid, pour order 0): 7390,2030 7390,1900 7630,1900 7675,1855 7840,1855 8005,1690 8005,1520 8040,1485 8210,1485 8275,1550 8275,1615 8240,1615 8230,1625 8180,1625 8180,1595 8190,1585 8190,1545 8185,1540 8075,1540 8060,1555 8060,1910 7935,2035 7395,2035
5V on Top Layer "NONET_L-01_P-001" (solid, pour order 1): 8290,1755 8290,1630 8300,1620 8460,1620 8465,1625 8465,1755 8425,1795 8425,1875 8410,1890 8340,1890 8325,1875 8325,1790
5V on Top Layer "NONET_L-01_P-001" (solid, pour order 2): 8580,1620 8560,1600 8560,1520 8570,1510 8670,1510 8680,1520 8680,1610 8670,1620
GND on Top Layer "NONET_L-01_P-001" (solid, remove dead copper, pour order 3): 7420,3890 7350,3820 7350,1445 7415,1380 9430,1380 9465,1415 9465,3860 9435,3890
GND on Bottom Layer "NONET_L-01_P-001" (solid, remove dead copper, pour order 4): 7420,3890 7350,3820 7350,1445 7415,1380 9430,1380 9465,1415 9465,3860 9435,3890
5V on POW (split plane): 7973.13,1696.17 7974.7,1694.96 7976.53,1694.21 7978.48,1693.95 8590.35,1693.95 8677.44,1606.87 8677.44,1449.2 7489.43,1449.2 7488.81,1449.14 7481.74,1449.49 7474.13,1450.62 7466.66,1452.48 7459.42,1455.08 7452.46,1458.37 7445.86,1462.32 7439.68,1466.91 7433.97,1472.08 7428.81,1477.78 7424.22,1483.96 7420.27,1490.56 7416.97,1497.52 7414.38,1504.76 7412.51,1512.23 7411.38,1519.84 7411.04,1526.91 7411.1,1527.53 7411.1,2122.44 7546.87,2122.44
VDD on POW (split plane): 9340.26,3808.72 9347.87,3807.59 9355.34,3805.72 9362.58,3803.13 9369.54,3799.84 9376.14,3795.88 9382.32,3791.3 9388.03,3786.13 9393.19,3780.43 9397.78,3774.25 9401.73,3767.64 9405.03,3760.69 9407.62,3753.44 9409.49,3745.98 9410.62,3738.36 9410.96,3731.3 9410.9,3730.68 9410.9,1527.53 9410.96,1526.91 9410.62,1519.84 9409.49,1512.23 9407.62,1504.76 9405.03,1497.52 9401.73,1490.56 9397.78,1483.96 9393.19,1477.78 9388.03,1472.08 9382.32,1466.91 9376.14,1462.32 9369.54,1458.37 9362.58,1455.08 9355.34,1452.48 9347.87,1450.62 9340.26,1449.49 9333.19,1449.14 9332.57,1449.2 8692.56,1449.2 8692.56,1610 8692.31,1611.96 8691.86,1613.03 8691.55,1613.78 8690.35,1615.35 8598.83,1706.87 8597.27,1708.07 8596.51,1708.38 8595.44,1708.82 8593.48,1709.08 8532.56,1709.08 8532.56,1825 8532.56,1880 8532.31,1881.96 8531.86,1883.03 8531.55,1883.78 8530.35,1885.35 8515.35,1900.35 8513.78,1901.55 8513.03,1901.86 8511.96,1902.31 8510,1902.56 8440,1902.56 8438.04,1902.31 8436.97,1901.86 8436.22,1901.55 8434.65,1900.35 8419.65,1885.35 8418.45,1883.78 8418.14,1883.03 8417.69,1881.96 8417.44,1880 8417.44,1818.13 8396.87,1797.56 8163.13,1797.56 7725.35,2235.35 7723.78,2236.55 7723.03,2236.86 7721.96,2237.31 7720,2237.56 7411.1,2237.56 7411.1,3730.68 7411.04,3731.3 7411.38,3738.36 7412.51,3745.98 7414.38,3753.44 7416.97,3760.69 7420.27,3767.64 7424.22,3774.25 7428.81,3780.43 7433.97,3786.13 7439.68,3791.3 7445.86,3795.88 7452.46,3799.84 7459.42,3803.13 7466.66,3805.72 7474.13,3807.59 7481.74,3808.72 7488.81,3809.07 7489.43,3809.01 9332.57,3809.01 9333.19,3809.07
3V3 on POW (split plane): 8154.65,1784.65 8156.22,1783.45 8156.97,1783.14 8158.04,1782.69 8160,1782.44 8400,1782.44 8401.96,1782.69 8403.03,1783.14 8403.78,1783.45 8405.35,1784.65 8430.35,1809.65 8431.55,1811.22 8432.31,1813.04 8432.56,1815 8432.56,1876.87 8443.13,1887.44 8506.87,1887.44 8517.44,1876.87 8517.44,1825 8517.44,1709.08 7981.62,1709.08 7555.35,2135.35 7553.78,2136.55 7553.03,2136.86 7551.96,2137.31 7550,2137.56 7411.1,2137.56 7411.1,2222.44 7716.87,2222.44
VDD on POW (split plane): 8234,2905.3 8234,2851.91 8234.26,2849.95 8234.7,2848.88 8235.01,2848.13 8236.22,2846.56 8252.44,2830.34 8252.44,2620 8252.69,2618.04 8253.14,2616.97 8253.45,2616.22 8254.65,2614.65 8317.44,2551.87 8317.44,2298.13 8306.87,2287.56 8193.13,2287.56 8162.56,2318.13 8162.56,2476.87 8188.06,2502.36 8189.26,2503.93 8190.02,2505.75 8190.28,2507.71 8190.28,2772.29 8190.02,2774.25 8189.58,2775.31 8189.26,2776.07 8188.06,2777.64 8157.56,2808.13 8157.56,2911.87 8178.13,2932.44 8206.87,2932.44
GND on GND (split plane): 9340.26,3808.72 9347.87,3807.59 9355.34,3805.72 9362.58,3803.13 9369.54,3799.84 9376.14,3795.88 9382.32,3791.3 9388.03,3786.13 9393.19,3780.43 9397.78,3774.25 9401.73,3767.64 9405.03,3760.69 9407.62,3753.44 9409.49,3745.98 9410.62,3738.36 9410.96,3731.3 9410.9,3730.68 9410.9,1527.53 9410.96,1526.91 9410.62,1519.84 9409.49,1512.23 9407.62,1504.76 9405.03,1497.52 9401.73,1490.56 9397.78,1483.96 9393.19,1477.78 9388.03,1472.08 9382.32,1466.91 9376.14,1462.32 9369.54,1458.37 9362.58,1455.08 9355.34,1452.48 9347.87,1450.62 9340.26,1449.49 9333.19,1449.14 9332.57,1449.2 7489.43,1449.2 7488.81,1449.14 7481.74,1449.49 7474.13,1450.62 7466.66,1452.48 7459.42,1455.08 7452.46,1458.37 7445.86,1462.32 7439.68,1466.91 7433.97,1472.08 7428.81,1477.78 7424.22,1483.96 7420.27,1490.56 7416.97,1497.52 7414.38,1504.76 7412.51,1512.23 7411.38,1519.84 7411.04,1526.91 7411.1,1527.53 7411.1,3730.68 7411.04,3731.3 7411.38,3738.36 7412.51,3745.98 7414.38,3753.44 7416.97,3760.69 7420.27,3767.64 7424.22,3774.25 7428.81,3780.43 7433.97,3786.13 7439.68,3791.3 7445.86,3795.88 7452.46,3799.84 7459.42,3803.13 7466.66,3805.72 7474.13,3807.59 7481.74,3808.72 7488.81,3809.07 7489.43,3809.01 9332.57,3809.01 9333.19,3809.07

## Keep-outs
Keep-Out Layer:
  the board outline again, w10

## Other copper
POW (plane layer: these items are gaps in the copper):
  lines w15: 7390,2130 7550,2130 7978.48,1701.52 8593.48,1701.52 8685,1610 8685,1425 ; 7390,2230 7720,2230 8160,1790 8400,1790 8425,1815 8425,1880 8440,1895 8510,1895 8525,1880 8525,1825 8525,1701.52 8463.48,1701.52 ; 8150,2805 8182.71,2772.29 8182.71,2507.71 8155,2480 8155,2315 8190,2280 8310,2280 8325,2295 8325,2555 8260,2620 8260,2833.48 8241.57,2851.91 8241.57,2908.43 8210,2940 8175,2940 8150,2915 8150,2805

## Silkscreen, mask and mechanical layers (free items; w line width, h text height)
Top Overlay:
  lines w10: 8446.29,2549.07 8471.29,2549.07 8471.29,2574.07
  text "通道D" at 9080,3690 h120
  text "AD5686R" at 7760,3585 h300
  text "四通道 16bit DAC" at 7760,3475 h120
  text "GND" at 7506,3249.99 h80
  text "VIO" at 7506.07,3149.99 h80
  text "通道C" at 9080,3090 h120
  text "LDAC" at 7506,3049.99 h80
  text "GAIN" at 7506,2949.99 h80
  text "SCLK" at 7506,2849.99 h80
  text "MOSI" at 7506,2749.99 h80
  text "MISO" at 7506,2649.99 h80
  text "EN" at 7506,2549.1 h80
  text "RESET" at 7506,2449.99 h80
  text "RSTSEL" at 7506,2349.99 h80
  text "VREF" at 7506.07,2249.1 h80
  text "3V3" at 7506,2149.99 h80
  text "通道A" at 9080,2055 h120
  text "5V" at 7506,2049.99 h80
  text "5V" at 8335,2005.89 h80
  text "33" at 8445,2005.89 h80
  text "IN" at 8245,2005 h80
  text "VIN" at 7506.07,1949.1 h80
  text "POW" at 8139.11,1780 h80 r90
  text "MR.Z" at 8749,1575 h120
  text "Studio" at 8727.06,1476.33 h120
  text "通道B" at 9080,1455 h120
Mechanical 1:
  lines w5: 8231,2469.1 8231,2789.1 8551,2789.1 8551,2469.1 8231,2469.1
  lines w10: 9231,1729.1 10139.1,1729.1 ; 9231,2329.1 10239.1,2329.1 ; 9231,2629.1 10004.1,2629.1 ; 9231,2929.1 10144.1,2929.1 ; 9231,3529.1 10299.1,3529.1 ; 7391,1527.53 ccw(c7489.43,1527.53) 7489.43,1429.1 9332.57,1429.1 ccw(c9332.57,1527.53) 9431,1527.53 9431,3730.68 ccw(c9332.57,3730.68) 9332.57,3829.1 7489.43,3829.1 ccw(c7489.43,3730.68) 7391,3730.68 7391,1527.53